# Altium PCB ALio Basic.PcbDoc (part 1 of 2)
Units mm, origin at the board's own origin, x right, y up, seen from the top; angles counter-clockwise.
Board outline 88.22 x 65.32 mm, 2 copper layers (Top Layer, Bottom Layer); 640 components, 0 nets, 4036 pads, 0 vias.
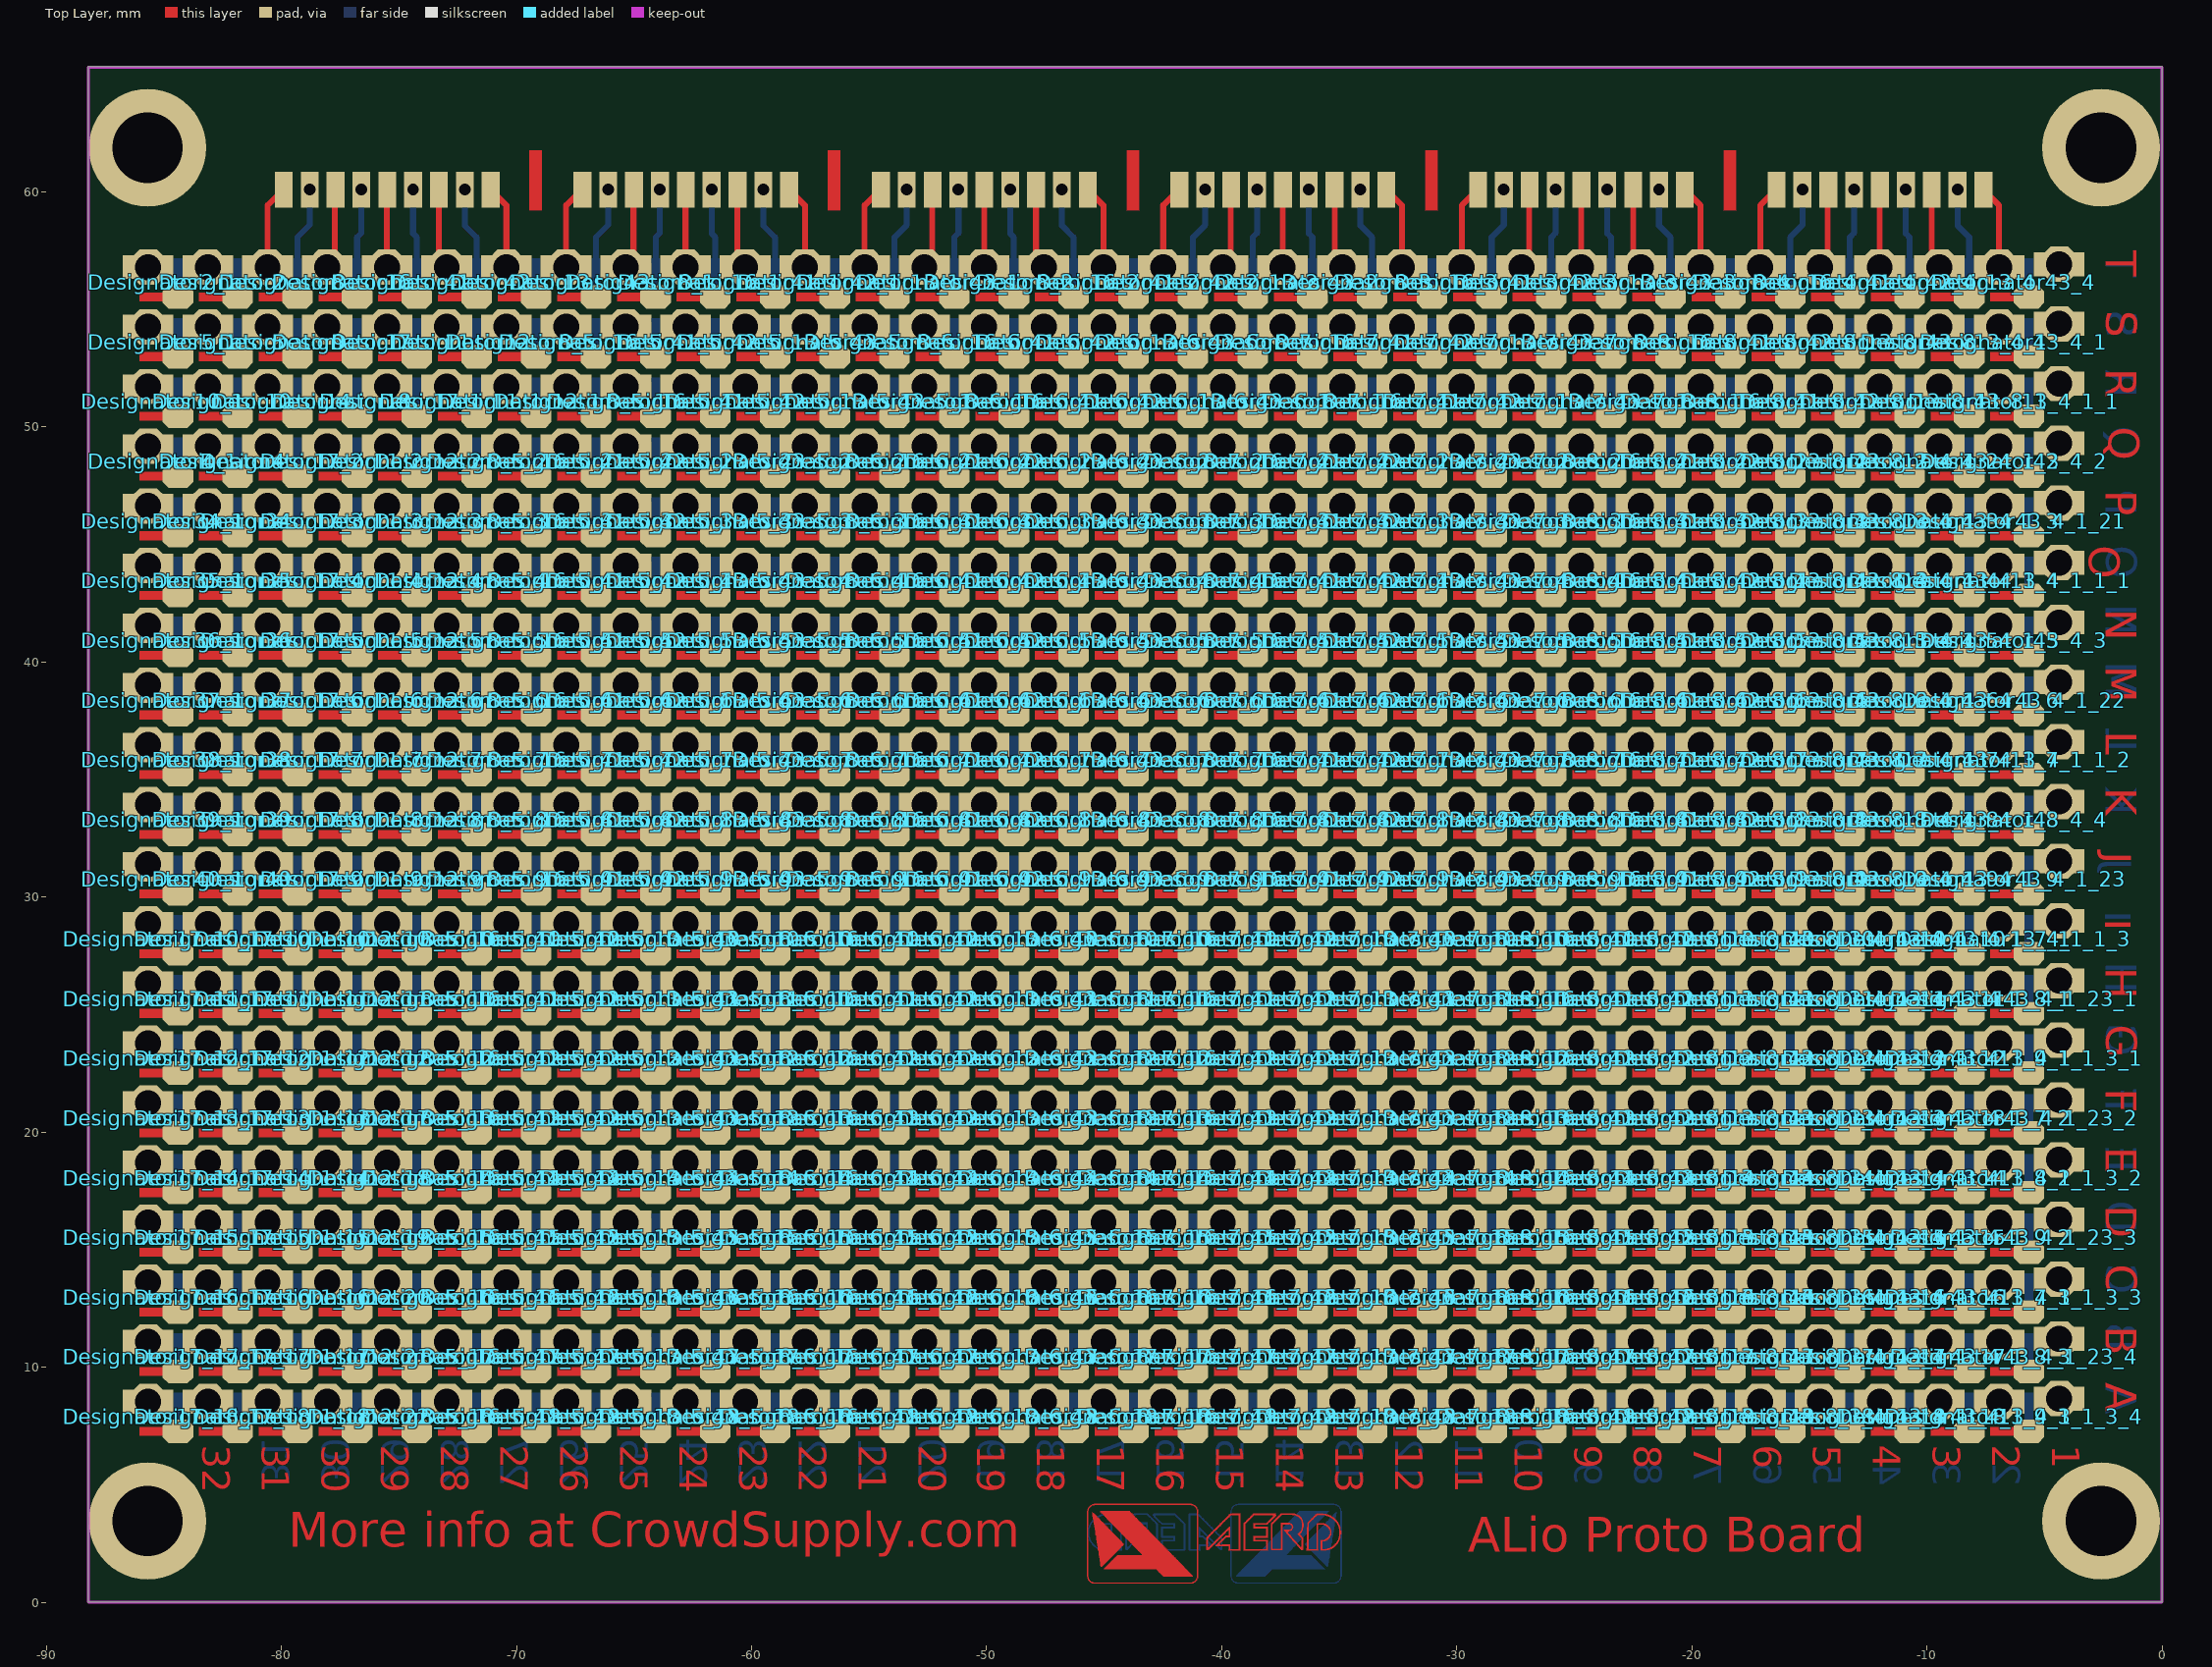
[diagram p0: Top Layer view]
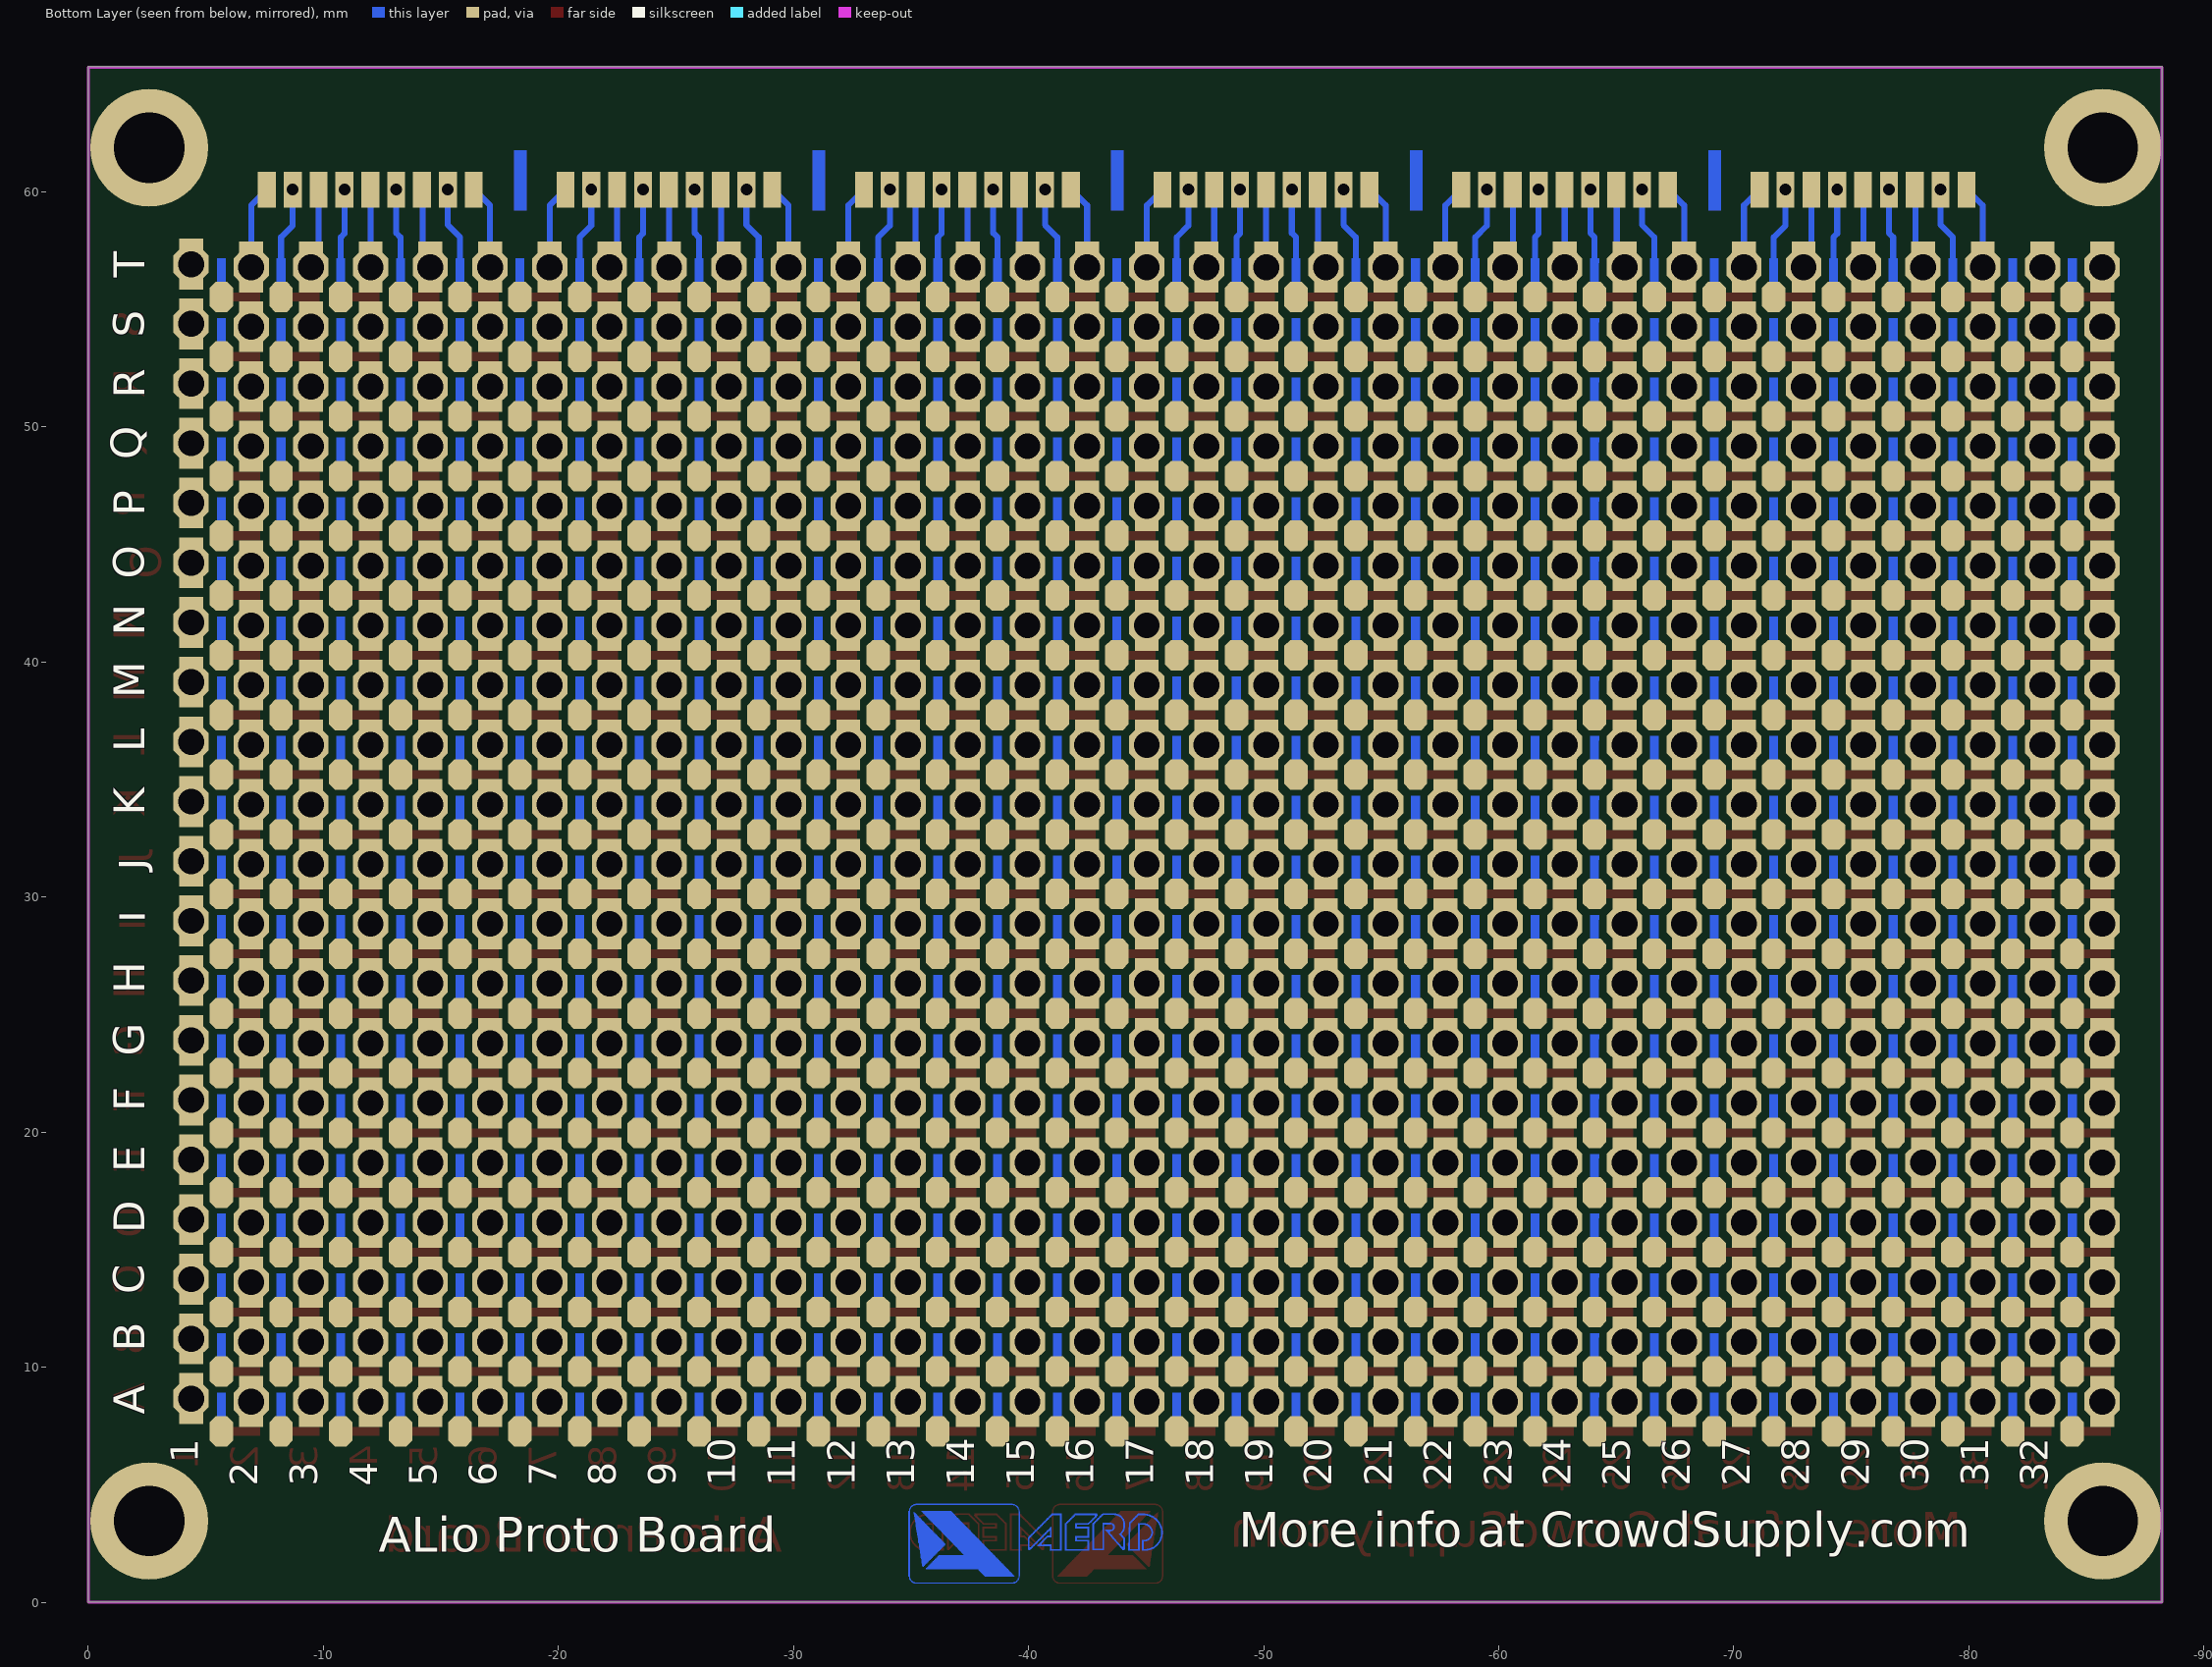
[diagram p1: Bottom Layer view, seen from below]

## Layer stack, top to bottom
Top Layer: signal copper 0.0356
Dielectric: dielectric 0.32, FR-4, Dk 4.8
Bottom Layer: signal copper 0.0356

## Board outline
0,59.85 0,65.33 -4.423,65.33 -88.221,65.33 -88.221,59.79 -88.221,0.01 -85.687,0.01 0,0.01 0,10.26

## Design rules (kind name [scope] priority, off if disabled: settings)
Clearance [All] p1 off: gap=0.254
ComponentClearance [All] p1 off: gap=0.254 collisioncheckmode=3 verticalgap=0.254 showdistances=FALSE
HoleToHoleClearance [All] p1 off: gap=0.254 allowstackedmicrovias=TRUE
MinimumSolderMaskSliver [All] p1 off: minsoldermaskwidth=0.254
PolygonConnect [All] p1: connectstyle=Relief reliefconductorwidth=0.254 reliefentries=4 polygonreliefangle="90 Angle"
RoutingVias [All] p1: holewidth=0.711 width=1.27 viastyle="Through Hole" minholewidth=0.711 minwidth=1.27 maxholewidth=0.711 maxwidth=1.27
ShortCircuit [All] p1 off: allowed=FALSE
SilkscreenOverComponentPads [All] p1: minsilkscreentomaskgap=0.254
SolderMaskExpansion [All] p1: expansion=0.102
UnRoutedNet [All] p1 off:
Width [All] p1: maxlimit=0.508 minlimit=0.127 preferedwidth=0.254
22 further rules are at their usual default settings.

## Components (designator, comment, footprint, x,y, rotation, side; value= is the part's Value field where it differs from the comment)
Designator2 "Comment" PROTO2WL -83.132,56.8 r0 top
Designator2_1 "Comment" PROTO2WL -85.672,56.8 r0 top
Designator4 "Comment" PROTO2WL -83.132,49.18 r0 top
Designator4_1 "Comment" PROTO2WL -85.672,49.18 r0 top
Designator5 "Comment" PROTO2WL -83.132,54.26 r0 top
Designator5_1 "Comment" PROTO2WL -85.672,54.26 r0 top
Designator8 "Comment" PROTO2WL -80.592,56.8 r0 top
Designator8_1 "Comment" PROTO2WL -65.352,56.8 r0 top
Designator8_2 "Comment" PROTO2WL -50.112,56.8 r0 top
Designator8_3 "Comment" PROTO2WL -34.872,56.8 r0 top
Designator8_4 "Comment" PROTO2WL -19.632,56.8 r0 top
Designator8_5 "Comment" PROTO2WL -70.432,54.26 r0 top
Designator8_5_1 "Comment" PROTO2WL -67.892,51.72 r0 top
Designator8_5_2 "Comment" PROTO2WL -72.972,49.18 r0 top
Designator8_5_3 "Comment" PROTO2WL -72.972,46.64 r0 top
Designator8_5_4 "Comment" PROTO2WL -72.972,44.1 r0 top
Designator8_5_5 "Comment" PROTO2WL -72.972,41.56 r0 top
Designator8_5_6 "Comment" PROTO2WL -72.972,39.02 r0 top
Designator8_5_7 "Comment" PROTO2WL -72.972,36.48 r0 top
Designator8_5_8 "Comment" PROTO2WL -72.972,33.94 r0 top
Designator8_5_9 "Comment" PROTO2WL -72.972,31.4 r0 top
Designator8_5_10 "Comment" PROTO2WL -75.512,28.86 r0 top
Designator8_5_11 "Comment" PROTO2WL -75.512,26.32 r0 top
Designator8_5_12 "Comment" PROTO2WL -75.512,23.78 r0 top
Designator8_5_13 "Comment" PROTO2WL -75.512,21.24 r0 top
Designator8_5_14 "Comment" PROTO2WL -75.512,18.7 r0 top
Designator8_5_15 "Comment" PROTO2WL -75.512,16.16 r0 top
Designator8_5_16 "Comment" PROTO2WL -75.512,13.62 r0 top
Designator8_5_17 "Comment" PROTO2WL -75.512,11.08 r0 top
Designator8_5_18 "Comment" PROTO2WL -75.512,8.54 r0 top
Designator8_6 "Comment" PROTO2WL -55.192,54.26 r0 top
Designator8_6_1 "Comment" PROTO2WL -52.652,51.72 r0 top
Designator8_6_2 "Comment" PROTO2WL -57.732,49.18 r0 top
Designator8_6_3 "Comment" PROTO2WL -57.732,46.64 r0 top
Designator8_6_4 "Comment" PROTO2WL -57.732,44.1 r0 top
Designator8_6_5 "Comment" PROTO2WL -57.732,41.56 r0 top
Designator8_6_6 "Comment" PROTO2WL -57.732,39.02 r0 top
Designator8_6_7 "Comment" PROTO2WL -57.732,36.48 r0 top
Designator8_6_8 "Comment" PROTO2WL -57.732,33.94 r0 top
Designator8_6_9 "Comment" PROTO2WL -57.732,31.4 r0 top
Designator8_6_10 "Comment" PROTO2WL -60.272,28.86 r0 top
Designator8_6_11 "Comment" PROTO2WL -60.272,26.32 r0 top
Designator8_6_12 "Comment" PROTO2WL -60.272,23.78 r0 top
Designator8_6_13 "Comment" PROTO2WL -60.272,21.24 r0 top
Designator8_6_14 "Comment" PROTO2WL -60.272,18.7 r0 top
Designator8_6_15 "Comment" PROTO2WL -60.272,16.16 r0 top
Designator8_6_16 "Comment" PROTO2WL -60.272,13.62 r0 top
Designator8_6_17 "Comment" PROTO2WL -60.272,11.08 r0 top
Designator8_6_18 "Comment" PROTO2WL -60.272,8.54 r0 top
Designator8_7 "Comment" PROTO2WL -39.952,54.26 r0 top
Designator8_7_1 "Comment" PROTO2WL -37.412,51.72 r0 top
Designator8_7_2 "Comment" PROTO2WL -42.492,49.18 r0 top
Designator8_7_3 "Comment" PROTO2WL -42.492,46.64 r0 top
Designator8_7_4 "Comment" PROTO2WL -42.492,44.1 r0 top
Designator8_7_5 "Comment" PROTO2WL -42.492,41.56 r0 top
Designator8_7_6 "Comment" PROTO2WL -42.492,39.02 r0 top
Designator8_7_7 "Comment" PROTO2WL -42.492,36.48 r0 top
Designator8_7_8 "Comment" PROTO2WL -42.492,33.94 r0 top
Designator8_7_9 "Comment" PROTO2WL -42.492,31.4 r0 top
Designator8_7_10 "Comment" PROTO2WL -45.032,28.86 r0 top
Designator8_7_11 "Comment" PROTO2WL -45.032,26.32 r0 top
Designator8_7_12 "Comment" PROTO2WL -45.032,23.78 r0 top
Designator8_7_13 "Comment" PROTO2WL -45.032,21.24 r0 top
Designator8_7_14 "Comment" PROTO2WL -45.032,18.7 r0 top
Designator8_7_15 "Comment" PROTO2WL -45.032,16.16 r0 top
Designator8_7_16 "Comment" PROTO2WL -45.032,13.62 r0 top
Designator8_7_17 "Comment" PROTO2WL -45.032,11.08 r0 top
Designator8_7_18 "Comment" PROTO2WL -45.032,8.54 r0 top
Designator8_8 "Comment" PROTO2WL -24.712,54.26 r0 top
Designator8_8_1 "Comment" PROTO2WL -22.172,51.72 r0 top
Designator8_8_2 "Comment" PROTO2WL -27.252,49.18 r0 top
Designator8_8_3 "Comment" PROTO2WL -27.252,46.64 r0 top
Designator8_8_4 "Comment" PROTO2WL -27.252,44.1 r0 top
Designator8_8_5 "Comment" PROTO2WL -27.252,41.56 r0 top
Designator8_8_6 "Comment" PROTO2WL -27.252,39.02 r0 top
Designator8_8_7 "Comment" PROTO2WL -27.252,36.48 r0 top
Designator8_8_8 "Comment" PROTO2WL -27.252,33.94 r0 top
Designator8_8_9 "Comment" PROTO2WL -27.252,31.4 r0 top
Designator8_8_10 "Comment" PROTO2WL -29.792,28.86 r0 top
Designator8_8_11 "Comment" PROTO2WL -29.792,26.32 r0 top
Designator8_8_12 "Comment" PROTO2WL -29.792,23.78 r0 top
Designator8_8_13 "Comment" PROTO2WL -29.792,21.24 r0 top
Designator8_8_14 "Comment" PROTO2WL -29.792,18.7 r0 top
Designator8_8_15 "Comment" PROTO2WL -29.792,16.16 r0 top
Designator8_8_16 "Comment" PROTO2WL -29.792,13.62 r0 top
Designator8_8_17 "Comment" PROTO2WL -29.792,11.08 r0 top
Designator8_8_18 "Comment" PROTO2WL -29.792,8.54 r0 top
Designator9 "Comment" PROTO2WL -80.592,54.26 r0 top
Designator10 "Comment" PROTO2WL -83.132,51.72 r0 top
Designator10_1 "Comment" PROTO2WL -85.672,51.72 r0 top
Designator11 "Comment" PROTO2WL -75.512,54.26 r0 top
Designator11_1 "Comment" PROTO2WL -72.972,51.72 r0 top
Designator11_2 "Comment" PROTO2WL -78.052,49.18 r0 top
Designator11_3 "Comment" PROTO2WL -78.052,46.64 r0 top
Designator11_4 "Comment" PROTO2WL -78.052,44.1 r0 top
Designator11_5 "Comment" PROTO2WL -78.052,41.56 r0 top
Designator11_6 "Comment" PROTO2WL -78.052,39.02 r0 top
Designator11_7 "Comment" PROTO2WL -78.052,36.48 r0 top
Designator11_8 "Comment" PROTO2WL -78.052,33.94 r0 top
Designator11_9 "Comment" PROTO2WL -78.052,31.4 r0 top
Designator11_10 "Comment" PROTO2WL -80.592,28.86 r0 top
Designator11_11 "Comment" PROTO2WL -80.592,26.32 r0 top
Designator11_12 "Comment" PROTO2WL -80.592,23.78 r0 top
Designator11_13 "Comment" PROTO2WL -80.592,21.24 r0 top
Designator11_14 "Comment" PROTO2WL -80.592,18.7 r0 top
Designator11_15 "Comment" PROTO2WL -80.592,16.16 r0 top
Designator11_16 "Comment" PROTO2WL -80.592,13.62 r0 top
Designator11_17 "Comment" PROTO2WL -80.592,11.08 r0 top
Designator11_18 "Comment" PROTO2WL -80.592,8.54 r0 top
Designator12 "Comment" PROTO2WL -72.972,54.26 r0 top
Designator12_1 "Comment" PROTO2WL -70.432,51.72 r0 top
Designator12_2 "Comment" PROTO2WL -75.512,49.18 r0 top
Designator12_3 "Comment" PROTO2WL -75.512,46.64 r0 top
Designator12_4 "Comment" PROTO2WL -75.512,44.1 r0 top
Designator12_5 "Comment" PROTO2WL -75.512,41.56 r0 top
Designator12_6 "Comment" PROTO2WL -75.512,39.02 r0 top
Designator12_7 "Comment" PROTO2WL -75.512,36.48 r0 top
Designator12_8 "Comment" PROTO2WL -75.512,33.94 r0 top
Designator12_9 "Comment" PROTO2WL -75.512,31.4 r0 top
Designator12_10 "Comment" PROTO2WL -78.052,28.86 r0 top
Designator12_11 "Comment" PROTO2WL -78.052,26.32 r0 top
Designator12_12 "Comment" PROTO2WL -78.052,23.78 r0 top
Designator12_17 "Comment" PROTO2WL -78.052,21.24 r0 top
Designator12_18 "Comment" PROTO2WL -78.052,18.7 r0 top
Designator12_19 "Comment" PROTO2WL -78.052,16.16 r0 top
Designator12_20 "Comment" PROTO2WL -78.052,13.62 r0 top
Designator12_21 "Comment" PROTO2WL -78.052,11.08 r0 top
Designator12_22 "Comment" PROTO2WL -78.052,8.54 r0 top
Designator13 "Comment" PROTO2WL -70.432,56.8 r0 top
Designator13_1 "Comment" PROTO2WL -55.192,56.8 r0 top
Designator13_2 "Comment" PROTO2WL -39.952,56.8 r0 top
Designator13_3 "Comment" PROTO2WL -24.712,56.8 r0 top
Designator13_4 "Comment" PROTO2WL -9.472,56.8 r0 top
Designator13_4_1 "Comment" PROTO2WL -9.472,54.26 r0 top
Designator13_4_1_1 "Comment" PROTO2WL -6.932,51.72 r0 top
Designator13_4_1_1_1 "Comment" PROTO2WL -6.932,44.1 r0 top
Designator13_4_1_1_2 "Comment" PROTO2WL -6.932,36.48 r0 top
Designator13_4_1_1_3 "Comment" PROTO2WL -6.932,28.86 r0 top
Designator13_4_1_1_3_1 "Comment" PROTO2WL -6.932,23.78 r0 top
Designator13_4_1_1_3_2 "Comment" PROTO2WL -6.932,18.7 r0 top
Designator13_4_1_1_3_3 "Comment" PROTO2WL -6.932,13.62 r0 top
Designator13_4_1_1_3_4 "Comment" PROTO2WL -6.932,8.54 r0 top
Designator13_4_1_2 "Comment" PROTO2WL -12.012,49.18 r0 top
Designator13_4_1_3 "Comment" PROTO2WL -12.012,46.64 r0 top
Designator13_4_1_4 "Comment" PROTO2WL -12.012,44.1 r0 top
Designator13_4_1_5 "Comment" PROTO2WL -12.012,41.56 r0 top
Designator13_4_1_6 "Comment" PROTO2WL -12.012,39.02 r0 top
Designator13_4_1_7 "Comment" PROTO2WL -12.012,36.48 r0 top
Designator13_4_1_8 "Comment" PROTO2WL -12.012,33.94 r0 top
Designator13_4_1_9 "Comment" PROTO2WL -12.012,31.4 r0 top
Designator13_4_1_10 "Comment" PROTO2WL -14.552,28.86 r0 top
Designator13_4_1_11 "Comment" PROTO2WL -14.552,26.32 r0 top
Designator13_4_1_12 "Comment" PROTO2WL -14.552,23.78 r0 top
Designator13_4_1_13 "Comment" PROTO2WL -14.552,21.24 r0 top
Designator13_4_1_14 "Comment" PROTO2WL -14.552,18.7 r0 top
Designator13_4_1_15 "Comment" PROTO2WL -14.552,16.16 r0 top
Designator13_4_1_16 "Comment" PROTO2WL -14.552,13.62 r0 top
Designator13_4_1_17 "Comment" PROTO2WL -14.552,11.08 r0 top
Designator13_4_1_18 "Comment" PROTO2WL -14.552,8.54 r0 top
Designator13_5 "Comment" PROTO2WL -60.272,54.26 r0 top
Designator13_5_1 "Comment" PROTO2WL -57.732,51.72 r0 top
Designator13_5_2 "Comment" PROTO2WL -62.812,49.18 r0 top
Designator13_5_3 "Comment" PROTO2WL -62.812,46.64 r0 top
Designator13_5_4 "Comment" PROTO2WL -62.812,44.1 r0 top
Designator13_5_5 "Comment" PROTO2WL -62.812,41.56 r0 top
Designator13_5_6 "Comment" PROTO2WL -62.812,39.02 r0 top
Designator13_5_7 "Comment" PROTO2WL -62.812,36.48 r0 top
Designator13_5_8 "Comment" PROTO2WL -62.812,33.94 r0 top
Designator13_5_9 "Comment" PROTO2WL -62.812,31.4 r0 top
Designator13_5_10 "Comment" PROTO2WL -65.352,28.86 r0 top
Designator13_5_11 "Comment" PROTO2WL -65.352,26.32 r0 top
Designator13_5_12 "Comment" PROTO2WL -65.352,23.78 r0 top
Designator13_5_13 "Comment" PROTO2WL -65.352,21.24 r0 top
Designator13_5_14 "Comment" PROTO2WL -65.352,18.7 r0 top
Designator13_5_15 "Comment" PROTO2WL -65.352,16.16 r0 top
Designator13_5_16 "Comment" PROTO2WL -65.352,13.62 r0 top
Designator13_5_17 "Comment" PROTO2WL -65.352,11.08 r0 top
Designator13_5_18 "Comment" PROTO2WL -65.352,8.54 r0 top
Designator13_6 "Comment" PROTO2WL -45.032,54.26 r0 top
Designator13_6_1 "Comment" PROTO2WL -42.492,51.72 r0 top
Designator13_6_2 "Comment" PROTO2WL -47.572,49.18 r0 top
Designator13_6_3 "Comment" PROTO2WL -47.572,46.64 r0 top
Designator13_6_4 "Comment" PROTO2WL -47.572,44.1 r0 top
Designator13_6_5 "Comment" PROTO2WL -47.572,41.56 r0 top
Designator13_6_6 "Comment" PROTO2WL -47.572,39.02 r0 top
Designator13_6_7 "Comment" PROTO2WL -47.572,36.48 r0 top
Designator13_6_8 "Comment" PROTO2WL -47.572,33.94 r0 top
Designator13_6_9 "Comment" PROTO2WL -47.572,31.4 r0 top
Designator13_6_10 "Comment" PROTO2WL -50.112,28.86 r0 top
Designator13_6_11 "Comment" PROTO2WL -50.112,26.32 r0 top
Designator13_6_12 "Comment" PROTO2WL -50.112,23.78 r0 top
Designator13_6_13 "Comment" PROTO2WL -50.112,21.24 r0 top
Designator13_6_14 "Comment" PROTO2WL -50.112,18.7 r0 top
Designator13_6_15 "Comment" PROTO2WL -50.112,16.16 r0 top
Designator13_6_16 "Comment" PROTO2WL -50.112,13.62 r0 top
Designator13_6_17 "Comment" PROTO2WL -50.112,11.08 r0 top
Designator13_6_18 "Comment" PROTO2WL -50.112,8.54 r0 top
Designator13_7 "Comment" PROTO2WL -29.792,54.26 r0 top
Designator13_7_1 "Comment" PROTO2WL -27.252,51.72 r0 top
Designator13_7_2 "Comment" PROTO2WL -32.332,49.18 r0 top
Designator13_7_3 "Comment" PROTO2WL -32.332,46.64 r0 top
Designator13_7_4 "Comment" PROTO2WL -32.332,44.1 r0 top
Designator13_7_5 "Comment" PROTO2WL -32.332,41.56 r0 top
Designator13_7_6 "Comment" PROTO2WL -32.332,39.02 r0 top
Designator13_7_7 "Comment" PROTO2WL -32.332,36.48 r0 top
Designator13_7_8 "Comment" PROTO2WL -32.332,33.94 r0 top
Designator13_7_9 "Comment" PROTO2WL -32.332,31.4 r0 top
Designator13_7_10 "Comment" PROTO2WL -34.872,28.86 r0 top
Designator13_7_11 "Comment" PROTO2WL -34.872,26.32 r0 top
Designator13_7_12 "Comment" PROTO2WL -34.872,23.78 r0 top
Designator13_7_13 "Comment" PROTO2WL -34.872,21.24 r0 top
Designator13_7_14 "Comment" PROTO2WL -34.872,18.7 r0 top
Designator13_7_15 "Comment" PROTO2WL -34.872,16.16 r0 top
Designator13_7_16 "Comment" PROTO2WL -34.872,13.62 r0 top
Designator13_7_17 "Comment" PROTO2WL -34.872,11.08 r0 top
Designator13_7_18 "Comment" PROTO2WL -34.872,8.54 r0 top
Designator13_8 "Comment" PROTO2WL -14.552,54.26 r0 top
Designator13_8_1 "Comment" PROTO2WL -12.012,51.72 r0 top
Designator13_8_2 "Comment" PROTO2WL -17.092,49.18 r0 top
Designator13_8_3 "Comment" PROTO2WL -17.092,46.64 r0 top
Designator13_8_4 "Comment" PROTO2WL -17.092,44.1 r0 top
Designator13_8_5 "Comment" PROTO2WL -17.092,41.56 r0 top
Designator13_8_6 "Comment" PROTO2WL -17.092,39.02 r0 top
Designator13_8_7 "Comment" PROTO2WL -17.092,36.48 r0 top
Designator13_8_8 "Comment" PROTO2WL -17.092,33.94 r0 top
Designator13_8_9 "Comment" PROTO2WL -17.092,31.4 r0 top
Designator13_8_10 "Comment" PROTO2WL -19.632,28.86 r0 top
Designator13_8_11 "Comment" PROTO2WL -19.632,26.32 r0 top
Designator13_8_12 "Comment" PROTO2WL -19.632,23.78 r0 top
Designator13_8_13 "Comment" PROTO2WL -19.632,21.24 r0 top
Designator13_8_14 "Comment" PROTO2WL -19.632,18.7 r0 top
Designator13_8_15 "Comment" PROTO2WL -19.632,16.16 r0 top
Designator13_8_16 "Comment" PROTO2WL -19.632,13.62 r0 top
Designator13_8_17 "Comment" PROTO2WL -19.632,11.08 r0 top
Designator13_8_18 "Comment" PROTO2WL -19.632,8.54 r0 top
Designator14 "Comment" PROTO2WL -80.592,51.72 r0 top
Designator16 "Comment" PROTO2WL -78.052,56.8 r0 top
Designator16_1 "Comment" PROTO2WL -62.812,56.8 r0 top
Designator16_2 "Comment" PROTO2WL -47.572,56.8 r0 top
Designator16_3 "Comment" PROTO2WL -32.332,56.8 r0 top
Designator16_4 "Comment" PROTO2WL -17.092,56.8 r0 top
Designator16_5 "Comment" PROTO2WL -67.892,54.26 r0 top
Designator16_5_1 "Comment" PROTO2WL -65.352,51.72 r0 top
Designator16_5_2 "Comment" PROTO2WL -70.432,49.18 r0 top
Designator16_5_3 "Comment" PROTO2WL -70.432,46.64 r0 top
Designator16_5_4 "Comment" PROTO2WL -70.432,44.1 r0 top
Designator16_5_5 "Comment" PROTO2WL -70.432,41.56 r0 top
Designator16_5_6 "Comment" PROTO2WL -70.432,39.02 r0 top
Designator16_5_7 "Comment" PROTO2WL -70.432,36.48 r0 top
Designator16_5_8 "Comment" PROTO2WL -70.432,33.94 r0 top
Designator16_5_9 "Comment" PROTO2WL -70.432,31.4 r0 top
Designator16_5_10 "Comment" PROTO2WL -72.972,28.86 r0 top
Designator16_5_11 "Comment" PROTO2WL -72.972,26.32 r0 top
Designator16_5_12 "Comment" PROTO2WL -72.972,23.78 r0 top
Designator16_5_13 "Comment" PROTO2WL -72.972,21.24 r0 top
Designator16_5_14 "Comment" PROTO2WL -72.972,18.7 r0 top
Designator16_5_15 "Comment" PROTO2WL -72.972,16.16 r0 top
Designator16_5_16 "Comment" PROTO2WL -72.972,13.62 r0 top
Designator16_5_17 "Comment" PROTO2WL -72.972,11.08 r0 top
Designator16_5_18 "Comment" PROTO2WL -72.972,8.54 r0 top
Designator16_6 "Comment" PROTO2WL -52.652,54.26 r0 top
Designator16_6_1 "Comment" PROTO2WL -50.112,51.72 r0 top
Designator16_6_2 "Comment" PROTO2WL -55.192,49.18 r0 top
Designator16_6_3 "Comment" PROTO2WL -55.192,46.64 r0 top
Designator16_6_4 "Comment" PROTO2WL -55.192,44.1 r0 top
Designator16_6_5 "Comment" PROTO2WL -55.192,41.56 r0 top
Designator16_6_6 "Comment" PROTO2WL -55.192,39.02 r0 top
Designator16_6_7 "Comment" PROTO2WL -55.192,36.48 r0 top
Designator16_6_8 "Comment" PROTO2WL -55.192,33.94 r0 top
Designator16_6_9 "Comment" PROTO2WL -55.192,31.4 r0 top
Designator16_6_10 "Comment" PROTO2WL -57.732,28.86 r0 top
Designator16_6_11 "Comment" PROTO2WL -57.732,26.32 r0 top
Designator16_6_12 "Comment" PROTO2WL -57.732,23.78 r0 top
Designator16_6_13 "Comment" PROTO2WL -57.732,21.24 r0 top
Designator16_6_14 "Comment" PROTO2WL -57.732,18.7 r0 top
Designator16_6_15 "Comment" PROTO2WL -57.732,16.16 r0 top
Designator16_6_16 "Comment" PROTO2WL -57.732,13.62 r0 top
Designator16_6_17 "Comment" PROTO2WL -57.732,11.08 r0 top
Designator16_6_18 "Comment" PROTO2WL -57.732,8.54 r0 top
Designator16_7 "Comment" PROTO2WL -37.412,54.26 r0 top
Designator16_7_1 "Comment" PROTO2WL -34.872,51.72 r0 top
Designator16_7_2 "Comment" PROTO2WL -39.952,49.18 r0 top
Designator16_7_3 "Comment" PROTO2WL -39.952,46.64 r0 top
Designator16_7_4 "Comment" PROTO2WL -39.952,44.1 r0 top
Designator16_7_5 "Comment" PROTO2WL -39.952,41.56 r0 top
Designator16_7_6 "Comment" PROTO2WL -39.952,39.02 r0 top
Designator16_7_7 "Comment" PROTO2WL -39.952,36.48 r0 top
Designator16_7_8 "Comment" PROTO2WL -39.952,33.94 r0 top
Designator16_7_9 "Comment" PROTO2WL -39.952,31.4 r0 top
Designator16_7_10 "Comment" PROTO2WL -42.492,28.86 r0 top
Designator16_7_11 "Comment" PROTO2WL -42.492,26.32 r0 top
Designator16_7_12 "Comment" PROTO2WL -42.492,23.78 r0 top
Designator16_7_13 "Comment" PROTO2WL -42.492,21.24 r0 top
Designator16_7_14 "Comment" PROTO2WL -42.492,18.7 r0 top
Designator16_7_15 "Comment" PROTO2WL -42.492,16.16 r0 top
Designator16_7_16 "Comment" PROTO2WL -42.492,13.62 r0 top
Designator16_7_17 "Comment" PROTO2WL -42.492,11.08 r0 top
Designator16_7_18 "Comment" PROTO2WL -42.492,8.54 r0 top
Designator16_8 "Comment" PROTO2WL -22.172,54.26 r0 top
Designator16_8_1 "Comment" PROTO2WL -19.632,51.72 r0 top
Designator16_8_2 "Comment" PROTO2WL -24.712,49.18 r0 top
Designator16_8_3 "Comment" PROTO2WL -24.712,46.64 r0 top
Designator16_8_4 "Comment" PROTO2WL -24.712,44.1 r0 top
Designator16_8_5 "Comment" PROTO2WL -24.712,41.56 r0 top
Designator16_8_6 "Comment" PROTO2WL -24.712,39.02 r0 top
Designator16_8_7 "Comment" PROTO2WL -24.712,36.48 r0 top
Designator16_8_8 "Comment" PROTO2WL -24.712,33.94 r0 top
Designator16_8_9 "Comment" PROTO2WL -24.712,31.4 r0 top
Designator16_8_10 "Comment" PROTO2WL -27.252,28.86 r0 top
Designator16_8_11 "Comment" PROTO2WL -27.252,26.32 r0 top
Designator16_8_12 "Comment" PROTO2WL -27.252,23.78 r0 top
Designator16_8_13 "Comment" PROTO2WL -27.252,21.24 r0 top
Designator16_8_14 "Comment" PROTO2WL -27.252,18.7 r0 top
Designator16_8_15 "Comment" PROTO2WL -27.252,16.16 r0 top
Designator16_8_16 "Comment" PROTO2WL -27.252,13.62 r0 top
Designator16_8_17 "Comment" PROTO2WL -27.252,11.08 r0 top
Designator16_8_18 "Comment" PROTO2WL -27.252,8.54 r0 top
Designator17 "Comment" PROTO2WL -78.052,54.26 r0 top
Designator17_1 "Comment" PROTO2WL -75.512,51.72 r0 top
Designator17_2 "Comment" PROTO2WL -80.592,49.18 r0 top
Designator17_3 "Comment" PROTO2WL -80.592,46.64 r0 top
Designator17_4 "Comment" PROTO2WL -80.592,44.1 r0 top
Designator17_5 "Comment" PROTO2WL -80.592,41.56 r0 top
Designator17_6 "Comment" PROTO2WL -80.592,39.02 r0 top
Designator17_7 "Comment" PROTO2WL -80.592,36.48 r0 top
Designator17_8 "Comment" PROTO2WL -80.592,33.94 r0 top
Designator17_9 "Comment" PROTO2WL -80.592,31.4 r0 top
Designator17_10 "Comment" PROTO2WL -83.132,28.86 r0 top
Designator17_10_1 "Comment" PROTO2WL -85.672,28.86 r0 top
Designator17_11 "Comment" PROTO2WL -83.132,26.32 r0 top
Designator17_11_1 "Comment" PROTO2WL -85.672,26.32 r0 top
Designator17_12 "Comment" PROTO2WL -83.132,23.78 r0 top
Designator17_12_1 "Comment" PROTO2WL -85.672,23.78 r0 top
Designator17_13 "Comment" PROTO2WL -83.132,21.24 r0 top
Designator17_13_1 "Comment" PROTO2WL -85.672,21.24 r0 top
Designator17_14 "Comment" PROTO2WL -83.132,18.7 r0 top
Designator17_14_1 "Comment" PROTO2WL -85.672,18.7 r0 top
Designator17_15 "Comment" PROTO2WL -83.132,16.16 r0 top
Designator17_15_1 "Comment" PROTO2WL -85.672,16.16 r0 top
Designator17_16 "Comment" PROTO2WL -83.132,13.62 r0 top
Designator17_16_1 "Comment" PROTO2WL -85.672,13.62 r0 top
Designator17_17 "Comment" PROTO2WL -83.132,11.08 r0 top
Designator17_17_1 "Comment" PROTO2WL -85.672,11.08 r0 top
Designator17_18 "Comment" PROTO2WL -83.132,8.54 r0 top
Designator17_18_1 "Comment" PROTO2WL -85.672,8.54 r0 top
Designator18 "Comment" PROTO2WL -78.052,51.72 r0 top
Designator34 "Comment" PROTO2WL -83.132,46.64 r0 top
Designator34_1 "Comment" PROTO2WL -85.672,46.64 r0 top
Designator35 "Comment" PROTO2WL -83.132,44.1 r0 top
Designator35_1 "Comment" PROTO2WL -85.672,44.1 r0 top
Designator36 "Comment" PROTO2WL -83.132,41.56 r0 top
Designator36_1 "Comment" PROTO2WL -85.672,41.56 r0 top
Designator37 "Comment" PROTO2WL -83.132,39.02 r0 top
Designator37_1 "Comment" PROTO2WL -85.672,39.02 r0 top
Designator38 "Comment" PROTO2WL -83.132,36.48 r0 top
Designator38_1 "Comment" PROTO2WL -85.672,36.48 r0 top
Designator39 "Comment" PROTO2WL -83.132,33.94 r0 top
Designator39_1 "Comment" PROTO2WL -85.672,33.94 r0 top
Designator40 "Comment" PROTO2WL -83.132,31.4 r0 top
Designator40_1 "Comment" PROTO2WL -85.672,31.4 r0 top
Designator41 "Comment" PROTO2WL -75.512,56.8 r0 top
Designator41_1 "Comment" PROTO2WL -60.272,56.8 r0 top
Designator41_2 "Comment" PROTO2WL -45.032,56.8 r0 top
Designator41_3 "Comment" PROTO2WL -29.792,56.8 r0 top
Designator41_4 "Comment" PROTO2WL -14.552,56.8 r0 top
Designator41_5 "Comment" PROTO2WL -65.352,54.26 r0 top
Designator41_5_1 "Comment" PROTO2WL -62.812,51.72 r0 top
Designator41_5_2 "Comment" PROTO2WL -67.892,49.18 r0 top
Designator41_5_3 "Comment" PROTO2WL -67.892,46.64 r0 top
Designator41_5_4 "Comment" PROTO2WL -67.892,44.1 r0 top
Designator41_5_5 "Comment" PROTO2WL -67.892,41.56 r0 top
Designator41_5_6 "Comment" PROTO2WL -67.892,39.02 r0 top
Designator41_5_7 "Comment" PROTO2WL -67.892,36.48 r0 top
Designator41_5_8 "Comment" PROTO2WL -67.892,33.94 r0 top
Designator41_5_9 "Comment" PROTO2WL -67.892,31.4 r0 top
Designator41_5_10 "Comment" PROTO2WL -70.432,28.86 r0 top
Designator41_5_11 "Comment" PROTO2WL -70.432,26.32 r0 top
Designator41_5_12 "Comment" PROTO2WL -70.432,23.78 r0 top
Designator41_5_13 "Comment" PROTO2WL -70.432,21.24 r0 top
Designator41_5_14 "Comment" PROTO2WL -70.432,18.7 r0 top
Designator41_5_15 "Comment" PROTO2WL -70.432,16.16 r0 top
Designator41_5_16 "Comment" PROTO2WL -70.432,13.62 r0 top
Designator41_5_17 "Comment" PROTO2WL -70.432,11.08 r0 top
Designator41_5_18 "Comment" PROTO2WL -70.432,8.54 r0 top
Designator41_6 "Comment" PROTO2WL -50.112,54.26 r0 top
Designator41_6_1 "Comment" PROTO2WL -47.572,51.72 r0 top
Designator41_6_2 "Comment" PROTO2WL -52.652,49.18 r0 top
Designator41_6_3 "Comment" PROTO2WL -52.652,46.64 r0 top
Designator41_6_4 "Comment" PROTO2WL -52.652,44.1 r0 top
Designator41_6_5 "Comment" PROTO2WL -52.652,41.56 r0 top
Designator41_6_6 "Comment" PROTO2WL -52.652,39.02 r0 top
Designator41_6_7 "Comment" PROTO2WL -52.652,36.48 r0 top
Designator41_6_8 "Comment" PROTO2WL -52.652,33.94 r0 top
Designator41_6_9 "Comment" PROTO2WL -52.652,31.4 r0 top
Designator41_6_10 "Comment" PROTO2WL -55.192,28.86 r0 top
Designator41_6_11 "Comment" PROTO2WL -55.192,26.32 r0 top
Designator41_6_12 "Comment" PROTO2WL -55.192,23.78 r0 top
Designator41_6_13 "Comment" PROTO2WL -55.192,21.24 r0 top
Designator41_6_14 "Comment" PROTO2WL -55.192,18.7 r0 top
Designator41_6_15 "Comment" PROTO2WL -55.192,16.16 r0 top
Designator41_6_16 "Comment" PROTO2WL -55.192,13.62 r0 top
Designator41_6_17 "Comment" PROTO2WL -55.192,11.08 r0 top
Designator41_6_18 "Comment" PROTO2WL -55.192,8.54 r0 top
Designator41_7 "Comment" PROTO2WL -34.872,54.26 r0 top
Designator41_7_1 "Comment" PROTO2WL -32.332,51.72 r0 top
Designator41_7_2 "Comment" PROTO2WL -37.412,49.18 r0 top
Designator41_7_3 "Comment" PROTO2WL -37.412,46.64 r0 top
Designator41_7_4 "Comment" PROTO2WL -37.412,44.1 r0 top
Designator41_7_5 "Comment" PROTO2WL -37.412,41.56 r0 top
Designator41_7_6 "Comment" PROTO2WL -37.412,39.02 r0 top
Designator41_7_7 "Comment" PROTO2WL -37.412,36.48 r0 top
Designator41_7_8 "Comment" PROTO2WL -37.412,33.94 r0 top
Designator41_7_9 "Comment" PROTO2WL -37.412,31.4 r0 top
Designator41_7_10 "Comment" PROTO2WL -39.952,28.86 r0 top
Designator41_7_11 "Comment" PROTO2WL -39.952,26.32 r0 top
Designator41_7_12 "Comment" PROTO2WL -39.952,23.78 r0 top
Designator41_7_13 "Comment" PROTO2WL -39.952,21.24 r0 top
Designator41_7_14 "Comment" PROTO2WL -39.952,18.7 r0 top
Designator41_7_15 "Comment" PROTO2WL -39.952,16.16 r0 top
Designator41_7_16 "Comment" PROTO2WL -39.952,13.62 r0 top
Designator41_7_17 "Comment" PROTO2WL -39.952,11.08 r0 top
Designator41_7_18 "Comment" PROTO2WL -39.952,8.54 r0 top
Designator41_8 "Comment" PROTO2WL -19.632,54.26 r0 top
Designator41_8_1 "Comment" PROTO2WL -17.092,51.72 r0 top
Designator41_8_2 "Comment" PROTO2WL -22.172,49.18 r0 top
Designator41_8_3 "Comment" PROTO2WL -22.172,46.64 r0 top
Designator41_8_4 "Comment" PROTO2WL -22.172,44.1 r0 top
Designator41_8_5 "Comment" PROTO2WL -22.172,41.56 r0 top
Designator41_8_6 "Comment" PROTO2WL -22.172,39.02 r0 top
Designator41_8_7 "Comment" PROTO2WL -22.172,36.48 r0 top
Designator41_8_8 "Comment" PROTO2WL -22.172,33.94 r0 top
Designator41_8_9 "Comment" PROTO2WL -22.172,31.4 r0 top
Designator41_8_10 "Comment" PROTO2WL -24.712,28.86 r0 top
Designator41_8_11 "Comment" PROTO2WL -24.712,26.32 r0 top
Designator41_8_12 "Comment" PROTO2WL -24.712,23.78 r0 top
Designator41_8_13 "Comment" PROTO2WL -24.712,21.24 r0 top
Designator41_8_14 "Comment" PROTO2WL -24.712,18.7 r0 top
Designator41_8_15 "Comment" PROTO2WL -24.712,16.16 r0 top
Designator41_8_16 "Comment" PROTO2WL -24.712,13.62 r0 top
Designator41_8_17 "Comment" PROTO2WL -24.712,11.08 r0 top
Designator41_8_18 "Comment" PROTO2WL -24.712,8.54 r0 top
Designator42 "Comment" PROTO2WL -72.972,56.8 r0 top
Designator42_1 "Comment" PROTO2WL -57.732,56.8 r0 top
Designator42_2 "Comment" PROTO2WL -42.492,56.8 r0 top
Designator42_3 "Comment" PROTO2WL -27.252,56.8 r0 top
Designator42_4 "Comment" PROTO2WL -12.012,56.8 r0 top
Designator42_5 "Comment" PROTO2WL -62.812,54.26 r0 top
Designator42_5_1 "Comment" PROTO2WL -60.272,51.72 r0 top
Designator42_5_2 "Comment" PROTO2WL -65.352,49.18 r0 top
Designator42_5_3 "Comment" PROTO2WL -65.352,46.64 r0 top
Designator42_5_4 "Comment" PROTO2WL -65.352,44.1 r0 top
Designator42_5_5 "Comment" PROTO2WL -65.352,41.56 r0 top
Designator42_5_6 "Comment" PROTO2WL -65.352,39.02 r0 top
Designator42_5_7 "Comment" PROTO2WL -65.352,36.48 r0 top
Designator42_5_8 "Comment" PROTO2WL -65.352,33.94 r0 top
Designator42_5_9 "Comment" PROTO2WL -65.352,31.4 r0 top
Designator42_5_10 "Comment" PROTO2WL -67.892,28.86 r0 top
Designator42_5_11 "Comment" PROTO2WL -67.892,26.32 r0 top
Designator42_5_12 "Comment" PROTO2WL -67.892,23.78 r0 top
Designator42_5_13 "Comment" PROTO2WL -67.892,21.24 r0 top
Designator42_5_14 "Comment" PROTO2WL -67.892,18.7 r0 top
Designator42_5_15 "Comment" PROTO2WL -67.892,16.16 r0 top
Designator42_5_16 "Comment" PROTO2WL -67.892,13.62 r0 top
Designator42_5_17 "Comment" PROTO2WL -67.892,11.08 r0 top
Designator42_5_18 "Comment" PROTO2WL -67.892,8.54 r0 top
Designator42_6 "Comment" PROTO2WL -47.572,54.26 r0 top
Designator42_6_1 "Comment" PROTO2WL -45.032,51.72 r0 top
Designator42_6_2 "Comment" PROTO2WL -50.112,49.18 r0 top
Designator42_6_3 "Comment" PROTO2WL -50.112,46.64 r0 top
Designator42_6_4 "Comment" PROTO2WL -50.112,44.1 r0 top
Designator42_6_5 "Comment" PROTO2WL -50.112,41.56 r0 top
Designator42_6_6 "Comment" PROTO2WL -50.112,39.02 r0 top
Designator42_6_7 "Comment" PROTO2WL -50.112,36.48 r0 top
Designator42_6_8 "Comment" PROTO2WL -50.112,33.94 r0 top
Designator42_6_9 "Comment" PROTO2WL -50.112,31.4 r0 top
Designator42_6_10 "Comment" PROTO2WL -52.652,28.86 r0 top
Designator42_6_11 "Comment" PROTO2WL -52.652,26.32 r0 top
Designator42_6_12 "Comment" PROTO2WL -52.652,23.78 r0 top
Designator42_6_13 "Comment" PROTO2WL -52.652,21.24 r0 top
Designator42_6_14 "Comment" PROTO2WL -52.652,18.7 r0 top
Designator42_6_15 "Comment" PROTO2WL -52.652,16.16 r0 top
Designator42_6_16 "Comment" PROTO2WL -52.652,13.62 r0 top
Designator42_6_17 "Comment" PROTO2WL -52.652,11.08 r0 top
Designator42_6_18 "Comment" PROTO2WL -52.652,8.54 r0 top
Designator42_7 "Comment" PROTO2WL -32.332,54.26 r0 top
Designator42_7_1 "Comment" PROTO2WL -29.792,51.72 r0 top
Designator42_7_2 "Comment" PROTO2WL -34.872,49.18 r0 top
Designator42_7_3 "Comment" PROTO2WL -34.872,46.64 r0 top
Designator42_7_4 "Comment" PROTO2WL -34.872,44.1 r0 top
Designator42_7_5 "Comment" PROTO2WL -34.872,41.56 r0 top
Designator42_7_6 "Comment" PROTO2WL -34.872,39.02 r0 top
Designator42_7_7 "Comment" PROTO2WL -34.872,36.48 r0 top
Designator42_7_8 "Comment" PROTO2WL -34.872,33.94 r0 top
Designator42_7_9 "Comment" PROTO2WL -34.872,31.4 r0 top
Designator42_7_10 "Comment" PROTO2WL -37.412,28.86 r0 top
Designator42_7_11 "Comment" PROTO2WL -37.412,26.32 r0 top
Designator42_7_12 "Comment" PROTO2WL -37.412,23.78 r0 top
Designator42_7_13 "Comment" PROTO2WL -37.412,21.24 r0 top
Designator42_7_14 "Comment" PROTO2WL -37.412,18.7 r0 top
Designator42_7_15 "Comment" PROTO2WL -37.412,16.16 r0 top
Designator42_7_16 "Comment" PROTO2WL -37.412,13.62 r0 top
Designator42_7_17 "Comment" PROTO2WL -37.412,11.08 r0 top
Designator42_7_18 "Comment" PROTO2WL -37.412,8.54 r0 top
Designator42_8 "Comment" PROTO2WL -17.092,54.26 r0 top
Designator42_8_1 "Comment" PROTO2WL -14.552,51.72 r0 top
Designator42_8_2 "Comment" PROTO2WL -19.632,49.18 r0 top
Designator42_8_3 "Comment" PROTO2WL -19.632,46.64 r0 top
Designator42_8_4 "Comment" PROTO2WL -19.632,44.1 r0 top
Designator42_8_5 "Comment" PROTO2WL -19.632,41.56 r0 top
Designator42_8_6 "Comment" PROTO2WL -19.632,39.02 r0 top
Designator42_8_7 "Comment" PROTO2WL -19.632,36.48 r0 top
Designator42_8_8 "Comment" PROTO2WL -19.632,33.94 r0 top
Designator42_8_9 "Comment" PROTO2WL -19.632,31.4 r0 top
Designator42_8_10 "Comment" PROTO2WL -22.172,28.86 r0 top
Designator42_8_11 "Comment" PROTO2WL -22.172,26.32 r0 top
Designator42_8_12 "Comment" PROTO2WL -22.172,23.78 r0 top
Designator42_8_13 "Comment" PROTO2WL -22.172,21.24 r0 top
Designator42_8_14 "Comment" PROTO2WL -22.172,18.7 r0 top
Designator42_8_15 "Comment" PROTO2WL -22.172,16.16 r0 top
Designator42_8_16 "Comment" PROTO2WL -22.172,13.62 r0 top
Designator42_8_17 "Comment" PROTO2WL -22.172,11.08 r0 top
Designator42_8_18 "Comment" PROTO2WL -22.172,8.54 r0 top
Designator43 "Comment" PROTO2WL -67.892,56.8 r0 top
Designator43_1 "Comment" PROTO2WL -52.652,56.8 r0 top
Designator43_2 "Comment" PROTO2WL -37.412,56.8 r0 top
Designator43_3 "Comment" PROTO2WL -22.172,56.8 r0 top
Designator43_4 "Comment" PROTO2WL -6.932,56.8 r0 top
Designator43_4_1 "Comment" PROTO2WL -6.932,54.26 r0 top
Designator43_4_1_2 "Comment" PROTO2WL -9.472,49.18 r0 top
Designator43_4_1_3 "Comment" PROTO2WL -9.472,46.64 r0 top
Designator43_4_1_4 "Comment" PROTO2WL -9.472,44.1 r0 top
Designator43_4_1_5 "Comment" PROTO2WL -9.472,41.56 r0 top
Designator43_4_1_6 "Comment" PROTO2WL -9.472,39.02 r0 top
Designator43_4_1_7 "Comment" PROTO2WL -9.472,36.48 r0 top
Designator43_4_1_7_1 "Comment" PROTO2WL -9.472,28.86 r0 top
Designator43_4_1_7_2 "Comment" PROTO2WL -9.472,21.24 r0 top
Designator43_4_1_7_3 "Comment" PROTO2WL -9.472,13.62 r0 top
Designator43_4_1_8 "Comment" PROTO2WL -9.472,33.94 r0 top
Designator43_4_1_8_1 "Comment" PROTO2WL -9.472,26.32 r0 top
Designator43_4_1_8_2 "Comment" PROTO2WL -9.472,18.7 r0 top
Designator43_4_1_8_3 "Comment" PROTO2WL -9.472,11.08 r0 top
Designator43_4_1_9 "Comment" PROTO2WL -9.472,31.4 r0 top
Designator43_4_1_9_1 "Comment" PROTO2WL -9.472,23.78 r0 top
Designator43_4_1_9_2 "Comment" PROTO2WL -9.472,16.16 r0 top
Designator43_4_1_9_3 "Comment" PROTO2WL -9.472,8.54 r0 top
Designator43_4_1_10 "Comment" PROTO2WL -12.012,28.86 r0 top
Designator43_4_1_11 "Comment" PROTO2WL -12.012,26.32 r0 top
Designator43_4_1_12 "Comment" PROTO2WL -12.012,23.78 r0 top
Designator43_4_1_13 "Comment" PROTO2WL -12.012,21.24 r0 top
Designator43_4_1_14 "Comment" PROTO2WL -12.012,18.7 r0 top
Designator43_4_1_15 "Comment" PROTO2WL -12.012,16.16 r0 top
Designator43_4_1_16 "Comment" PROTO2WL -12.012,13.62 r0 top
Designator43_4_1_17 "Comment" PROTO2WL -12.012,11.08 r0 top
Designator43_4_1_18 "Comment" PROTO2WL -12.012,8.54 r0 top
Designator43_4_1_21 "Comment" PROTO2WL -6.932,46.64 r0 top
Designator43_4_1_22 "Comment" PROTO2WL -6.932,39.02 r0 top
Designator43_4_1_23 "Comment" PROTO2WL -6.932,31.4 r0 top
Designator43_4_1_23_1 "Comment" PROTO2WL -6.932,26.32 r0 top
Designator43_4_1_23_2 "Comment" PROTO2WL -6.932,21.24 r0 top
Designator43_4_1_23_3 "Comment" PROTO2WL -6.932,16.16 r0 top
Designator43_4_1_23_4 "Comment" PROTO2WL -6.932,11.08 r0 top
Designator43_4_2 "Comment" PROTO2WL -6.932,49.18 r0 top
Designator43_4_3 "Comment" PROTO2WL -6.932,41.56 r0 top
Designator43_4_4 "Comment" PROTO2WL -6.932,33.94 r0 top
Designator43_5 "Comment" PROTO2WL -57.732,54.26 r0 top
Designator43_5_1 "Comment" PROTO2WL -55.192,51.72 r0 top
Designator43_5_2 "Comment" PROTO2WL -60.272,49.18 r0 top
Designator43_5_3 "Comment" PROTO2WL -60.272,46.64 r0 top
Designator43_5_4 "Comment" PROTO2WL -60.272,44.1 r0 top
Designator43_5_5 "Comment" PROTO2WL -60.272,41.56 r0 top
Designator43_5_6 "Comment" PROTO2WL -60.272,39.02 r0 top
Designator43_5_7 "Comment" PROTO2WL -60.272,36.48 r0 top
Designator43_5_8 "Comment" PROTO2WL -60.272,33.94 r0 top
Designator43_5_9 "Comment" PROTO2WL -60.272,31.4 r0 top
Designator43_5_10 "Comment" PROTO2WL -62.812,28.86 r0 top
Designator43_5_11 "Comment" PROTO2WL -62.812,26.32 r0 top
Designator43_5_12 "Comment" PROTO2WL -62.812,23.78 r0 top
Designator43_5_13 "Comment" PROTO2WL -62.812,21.24 r0 top
Designator43_5_14 "Comment" PROTO2WL -62.812,18.7 r0 top
Designator43_5_15 "Comment" PROTO2WL -62.812,16.16 r0 top
Designator43_5_16 "Comment" PROTO2WL -62.812,13.62 r0 top
Designator43_5_17 "Comment" PROTO2WL -62.812,11.08 r0 top
Designator43_5_18 "Comment" PROTO2WL -62.812,8.54 r0 top
Designator43_6 "Comment" PROTO2WL -42.492,54.26 r0 top
Designator43_6_1 "Comment" PROTO2WL -39.952,51.72 r0 top
Designator43_6_2 "Comment" PROTO2WL -45.032,49.18 r0 top
Designator43_6_3 "Comment" PROTO2WL -45.032,46.64 r0 top
Designator43_6_4 "Comment" PROTO2WL -45.032,44.1 r0 top
Designator43_6_5 "Comment" PROTO2WL -45.032,41.56 r0 top
Designator43_6_6 "Comment" PROTO2WL -45.032,39.02 r0 top
Designator43_6_7 "Comment" PROTO2WL -45.032,36.48 r0 top
Designator43_6_8 "Comment" PROTO2WL -45.032,33.94 r0 top
Designator43_6_9 "Comment" PROTO2WL -45.032,31.4 r0 top
Designator43_6_10 "Comment" PROTO2WL -47.572,28.86 r0 top
Designator43_6_11 "Comment" PROTO2WL -47.572,26.32 r0 top
Designator43_6_12 "Comment" PROTO2WL -47.572,23.78 r0 top
Designator43_6_13 "Comment" PROTO2WL -47.572,21.24 r0 top
Designator43_6_14 "Comment" PROTO2WL -47.572,18.7 r0 top
Designator43_6_15 "Comment" PROTO2WL -47.572,16.16 r0 top
Designator43_6_16 "Comment" PROTO2WL -47.572,13.62 r0 top
Designator43_6_17 "Comment" PROTO2WL -47.572,11.08 r0 top
Designator43_6_18 "Comment" PROTO2WL -47.572,8.54 r0 top
Designator43_7 "Comment" PROTO2WL -27.252,54.26 r0 top
Designator43_7_1 "Comment" PROTO2WL -24.712,51.72 r0 top
Designator43_7_2 "Comment" PROTO2WL -29.792,49.18 r0 top
Designator43_7_3 "Comment" PROTO2WL -29.792,46.64 r0 top
Designator43_7_4 "Comment" PROTO2WL -29.792,44.1 r0 top
Designator43_7_5 "Comment" PROTO2WL -29.792,41.56 r0 top
Designator43_7_6 "Comment" PROTO2WL -29.792,39.02 r0 top
Designator43_7_7 "Comment" PROTO2WL -29.792,36.48 r0 top
Designator43_7_8 "Comment" PROTO2WL -29.792,33.94 r0 top
Designator43_7_9 "Comment" PROTO2WL -29.792,31.4 r0 top
Designator43_7_10 "Comment" PROTO2WL -32.332,28.86 r0 top
Designator43_7_11 "Comment" PROTO2WL -32.332,26.32 r0 top
Designator43_7_12 "Comment" PROTO2WL -32.332,23.78 r0 top
Designator43_7_13 "Comment" PROTO2WL -32.332,21.24 r0 top
Designator43_7_14 "Comment" PROTO2WL -32.332,18.7 r0 top
Designator43_7_15 "Comment" PROTO2WL -32.332,16.16 r0 top
Designator43_7_16 "Comment" PROTO2WL -32.332,13.62 r0 top
Designator43_7_17 "Comment" PROTO2WL -32.332,11.08 r0 top
Designator43_7_18 "Comment" PROTO2WL -32.332,8.54 r0 top
Designator43_8 "Comment" PROTO2WL -12.012,54.26 r0 top
Designator43_8_1 "Comment" PROTO2WL -9.472,51.72 r0 top
Designator43_8_2 "Comment" PROTO2WL -14.552,49.18 r0 top
Designator43_8_3 "Comment" PROTO2WL -14.552,46.64 r0 top
Designator43_8_4 "Comment" PROTO2WL -14.552,44.1 r0 top
Designator43_8_5 "Comment" PROTO2WL -14.552,41.56 r0 top
Designator43_8_6 "Comment" PROTO2WL -14.552,39.02 r0 top
Designator43_8_7 "Comment" PROTO2WL -14.552,36.48 r0 top
Designator43_8_8 "Comment" PROTO2WL -14.552,33.94 r0 top
Designator43_8_9 "Comment" PROTO2WL -14.552,31.4 r0 top
Designator43_8_10 "Comment" PROTO2WL -17.092,28.86 r0 top
Designator43_8_11 "Comment" PROTO2WL -17.092,26.32 r0 top
Designator43_8_12 "Comment" PROTO2WL -17.092,23.78 r0 top
Designator43_8_13 "Comment" PROTO2WL -17.092,21.24 r0 top
Designator43_8_14 "Comment" PROTO2WL -17.092,18.7 r0 top
Designator43_8_15 "Comment" PROTO2WL -17.092,16.16 r0 top
Designator43_8_16 "Comment" PROTO2WL -17.092,13.62 r0 top
Designator43_8_17 "Comment" PROTO2WL -17.092,11.08 r0 top
Designator43_8_18 "Comment" PROTO2WL -17.092,8.54 r0 top

## Footprints (in the part's own frame and the unit in brackets; to place one, negate y for a bottom-side part, rotate by r counter-clockwise, add the part's x,y. Pads: shape width x height; smd on the part's side, far side on the other; paste and mask are expansions set on the pad)
PROTO2WL [mm]
  oct 1.5x1.5 hole 1.1 unplated: 1(0,0)
  rect 1.016x2.159 smd far side: 1(0,0)
  rect 2.159x1.016 smd: 1(0,0)
  oct 1x1 all layers, no hole: 2(1.27,-1.27)
  oct 1x1.3 smd far side: 2(1.27,-1.27)
  oct 1.3x1 smd: 2(1.27,-1.27)
  Top Layer region: -0.375,-1.46 -0.178,-1.46 -0.178,-1.24 -0.375,-1.24
  Top Layer region: -0.375,-1.3 -0.178,-1.3 -0.178,-1.079 -0.375,-1.079
  Top Layer lines w0.381: -0.178,-1.27 0.843,-1.27
  Bottom Layer region: 1.079,0.375 1.079,0.178 1.3,0.178 1.3,0.375
  Bottom Layer region: 1.24,0.375 1.24,0.178 1.46,0.178 1.46,0.375
  Bottom Layer lines w0.381: 1.27,-0.843 1.27,0.178

## Free pads (board coordinates)
  round 5 hole 3: 1(-85.695,3.46) 1(-85.695,61.88) 1(-2.593,3.46) 1(-2.593,61.88)
  rect 0.762x1.524 smd: 1(-79.901,60.1) 1(-67.201,60.1) 1(-54.501,60.1) 1(-41.801,60.1) 1(-29.101,60.1) 1(-16.401,60.1) 2(-78.801,60.1) 2(-66.101,60.1) 2(-53.401,60.1) 2(-40.701,60.1) 2(-28.001,60.1) 2(-15.301,60.1) 3(-77.701,60.1) 3(-65.001,60.1) 3(-52.301,60.1) 3(-39.601,60.1) 3(-26.901,60.1) 3(-14.201,60.1) 4(-76.601,60.1) 4(-63.901,60.1) 4(-51.201,60.1) 4(-38.501,60.1) 4(-25.801,60.1) 4(-13.101,60.1) 5(-75.501,60.1) 5(-62.801,60.1) 5(-50.101,60.1) 5(-37.401,60.1) 5(-24.701,60.1) 5(-12.001,60.1) 6(-74.401,60.1) 6(-61.701,60.1) 6(-49.001,60.1) 6(-36.301,60.1) 6(-23.601,60.1) 6(-10.901,60.1) 7(-73.301,60.1) 7(-60.601,60.1) 7(-47.901,60.1) 7(-35.201,60.1) 7(-22.501,60.1) 7(-9.801,60.1) 8(-72.201,60.1) 8(-59.501,60.1) 8(-46.801,60.1) 8(-34.101,60.1) 8(-21.401,60.1) 8(-8.701,60.1) 9(-71.101,60.1) 9(-58.401,60.1) 9(-45.701,60.1) 9(-33.001,60.1) 9(-20.301,60.1) 9(-7.601,60.1)
  rect 0.7x0.7 hole 0.5: 1(-78.801,60.1) 1(-76.601,60.1) 1(-74.401,60.1) 1(-72.201,60.1) 1(-66.101,60.1) 1(-63.901,60.1) 1(-61.701,60.1) 1(-59.501,60.1) 1(-53.401,60.1) 1(-51.201,60.1) 1(-49.001,60.1) 1(-46.801,60.1) 1(-40.701,60.1) 1(-38.501,60.1) 1(-36.301,60.1) 1(-34.101,60.1) 1(-28.001,60.1) 1(-25.801,60.1) 1(-23.601,60.1) 1(-21.401,60.1) 1(-15.301,60.1) 1(-13.101,60.1) 1(-10.901,60.1) 1(-8.701,60.1)
  rect 0.762x1.524 smd far side: 1(-71.101,60.1) 1(-58.401,60.1) 1(-45.701,60.1) 1(-33.001,60.1) 1(-20.301,60.1) 1(-7.601,60.1) 2(-72.201,60.1) 2(-59.501,60.1) 2(-46.801,60.1) 2(-34.101,60.1) 2(-21.401,60.1) 2(-8.701,60.1) 3(-73.301,60.1) 3(-60.601,60.1) 3(-47.901,60.1) 3(-35.201,60.1) 3(-22.501,60.1) 3(-9.801,60.1) 4(-74.401,60.1) 4(-61.701,60.1) 4(-49.001,60.1) 4(-36.301,60.1) 4(-23.601,60.1) 4(-10.901,60.1) 5(-75.501,60.1) 5(-62.801,60.1) 5(-50.101,60.1) 5(-37.401,60.1) 5(-24.701,60.1) 5(-12.001,60.1) 6(-76.601,60.1) 6(-63.901,60.1) 6(-51.201,60.1) 6(-38.501,60.1) 6(-25.801,60.1) 6(-13.101,60.1) 7(-77.701,60.1) 7(-65.001,60.1) 7(-52.301,60.1) 7(-39.601,60.1) 7(-26.901,60.1) 7(-14.201,60.1) 8(-78.801,60.1) 8(-66.101,60.1) 8(-53.401,60.1) 8(-40.701,60.1) 8(-28.001,60.1) 8(-15.301,60.1) 9(-79.901,60.1) 9(-67.201,60.1) 9(-54.501,60.1) 9(-41.801,60.1) 9(-29.101,60.1) 9(-16.401,60.1)
  oct 1.5x1.5 hole 1.1 unplated: 1(-4.376,8.665) 1(-4.376,11.205) 1(-4.376,13.745) 1(-4.376,16.285) 1(-4.376,18.825) 1(-4.376,21.365) 1(-4.376,23.905) 1(-4.376,26.445) 1(-4.376,28.985) 1(-4.376,31.525) 1(-4.376,34.065) 1(-4.376,36.605) 1(-4.376,39.145) 1(-4.376,41.685) 1(-4.376,44.225) 1(-4.376,46.765) 1(-4.376,49.305) 1(-4.376,51.845) 1(-4.376,54.385) 1(-4.376,56.925)
  rect 1.016x2.159 smd far side: 1(-4.376,8.665) 1(-4.376,11.205) 1(-4.376,13.745) 1(-4.376,16.285) 1(-4.376,18.825) 1(-4.376,21.365) 1(-4.376,23.905) 1(-4.376,26.445) 1(-4.376,28.985) 1(-4.376,31.525) 1(-4.376,34.065) 1(-4.376,36.605) 1(-4.376,39.145) 1(-4.376,41.685) 1(-4.376,44.225) 1(-4.376,46.765) 1(-4.376,49.305) 1(-4.376,51.845) 1(-4.376,54.385) 1(-4.376,56.925)
  rect 2.159x1.016 smd: 1(-4.376,8.665) 1(-4.376,11.205) 1(-4.376,13.745) 1(-4.376,16.285) 1(-4.376,18.825) 1(-4.376,21.365) 1(-4.376,23.905) 1(-4.376,26.445) 1(-4.376,28.985) 1(-4.376,31.525) 1(-4.376,34.065) 1(-4.376,36.605) 1(-4.376,39.145) 1(-4.376,41.685) 1(-4.376,44.225) 1(-4.376,46.765) 1(-4.376,49.305) 1(-4.376,51.845) 1(-4.376,54.385) 1(-4.376,56.925)